# EAGLE board 24S IR PCB v12 (EAGLE 9.7.0)
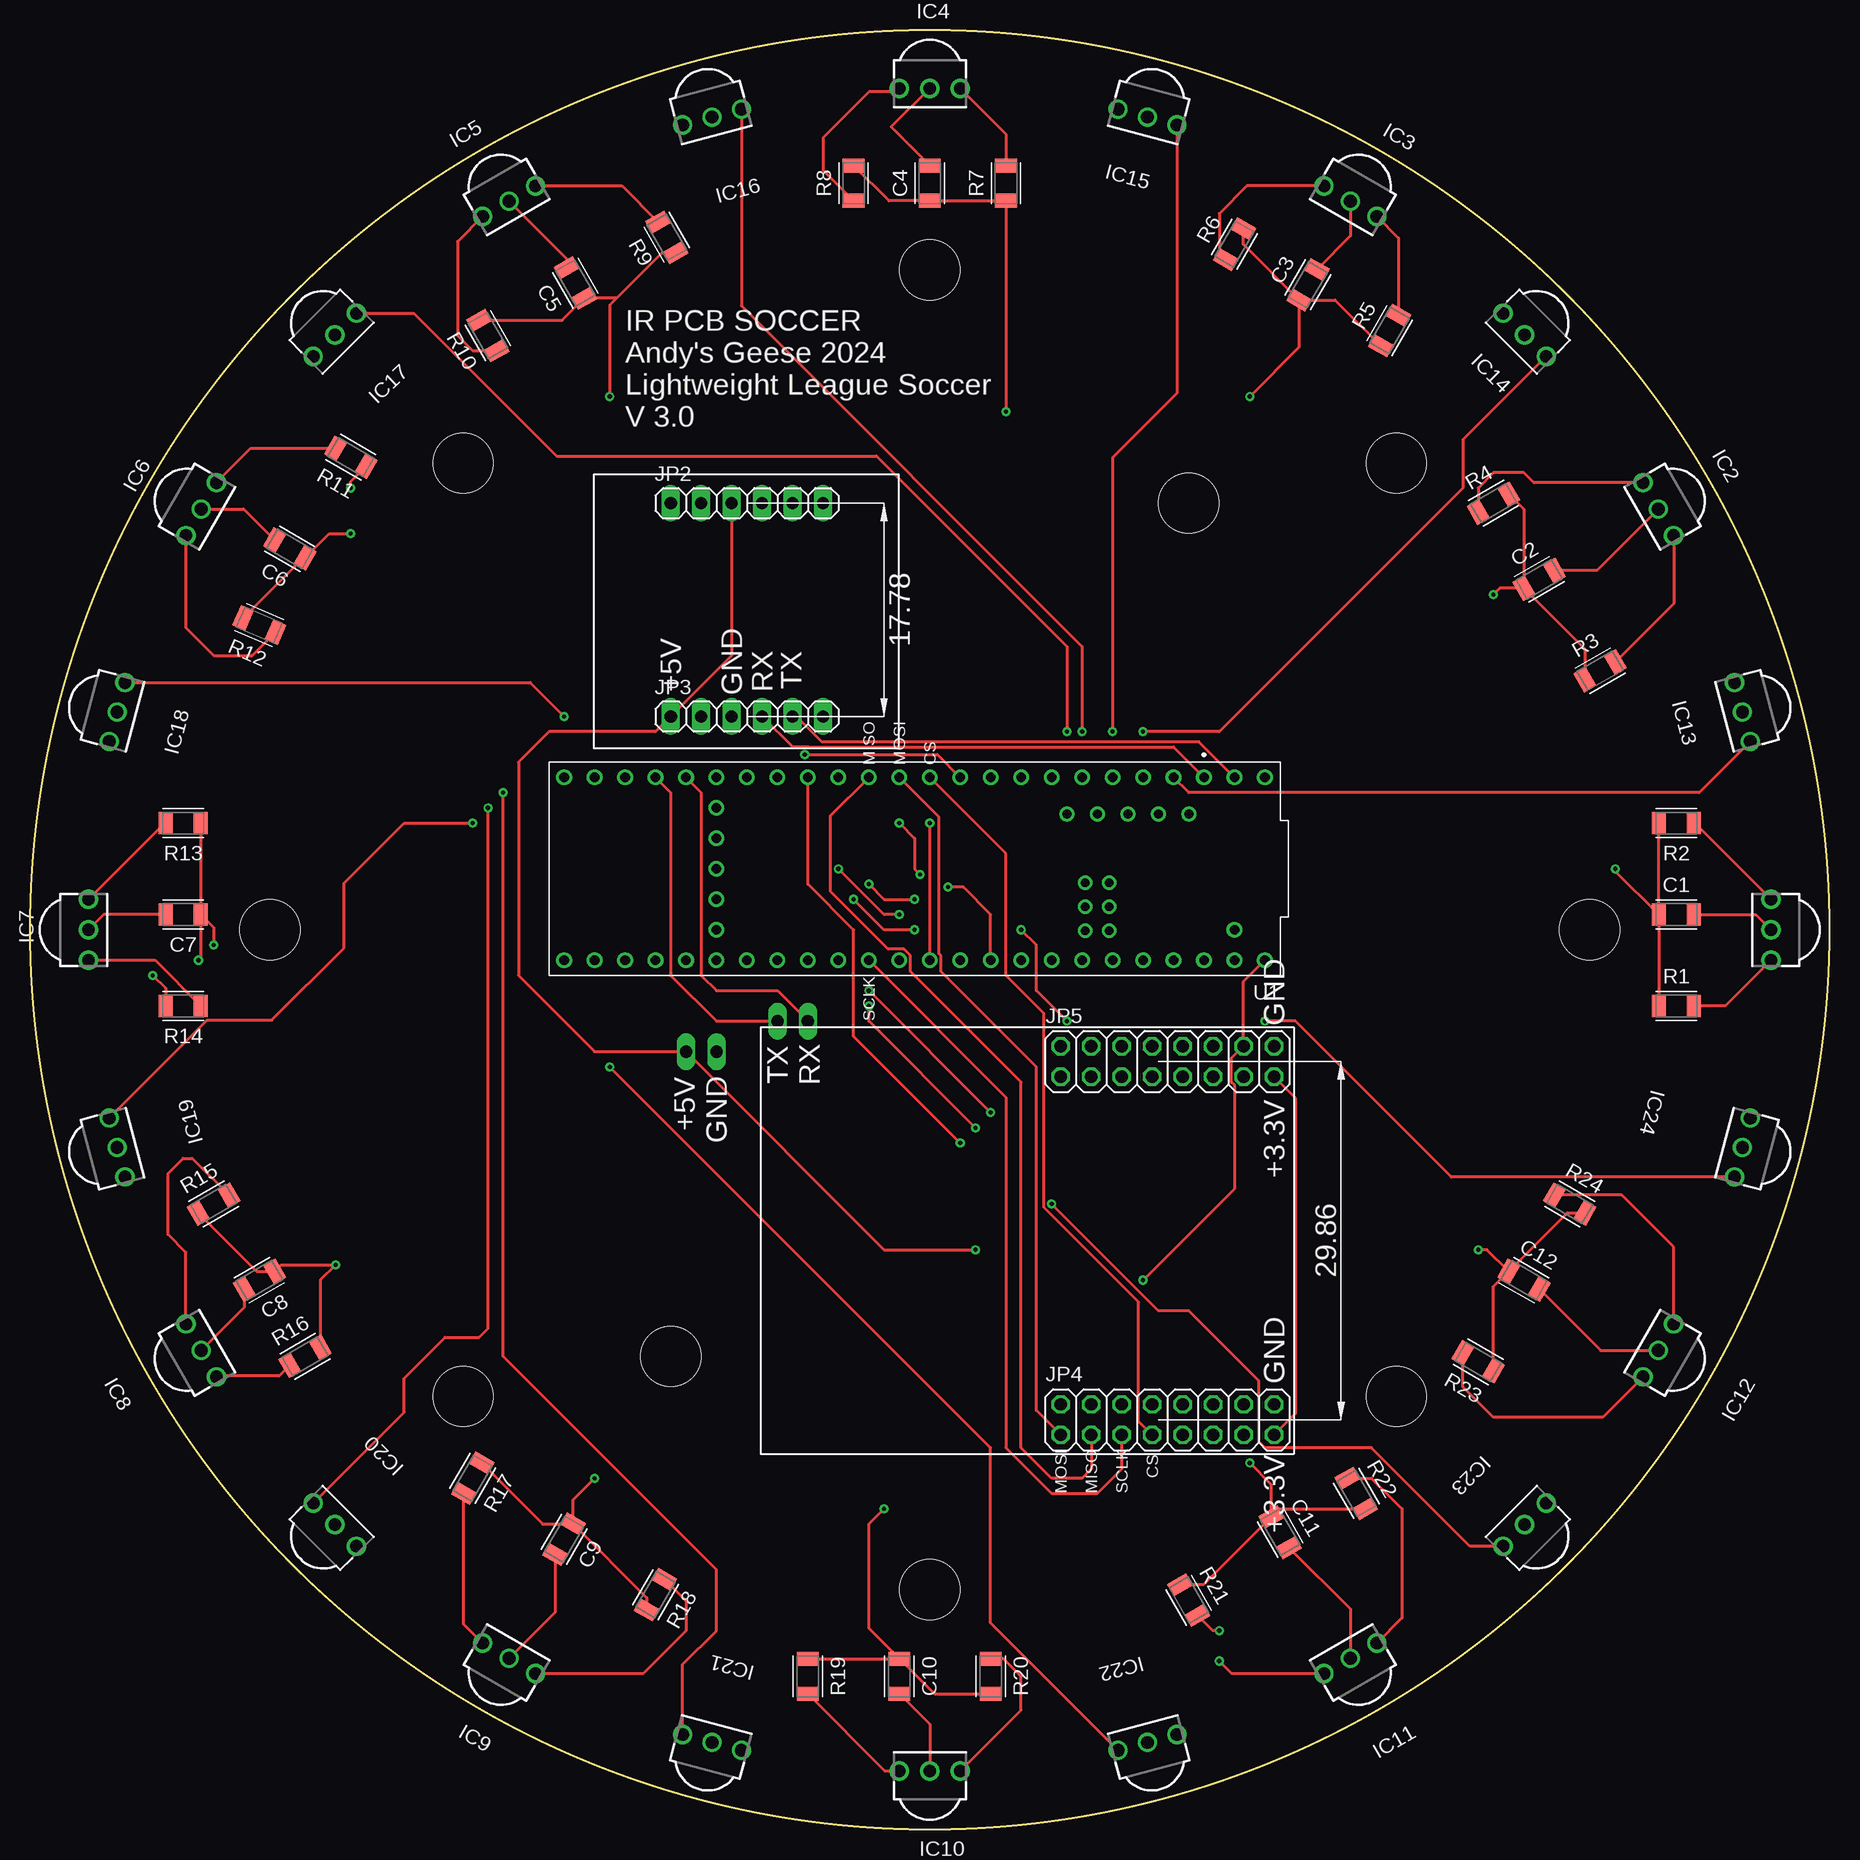
[diagram p0: board, top side]
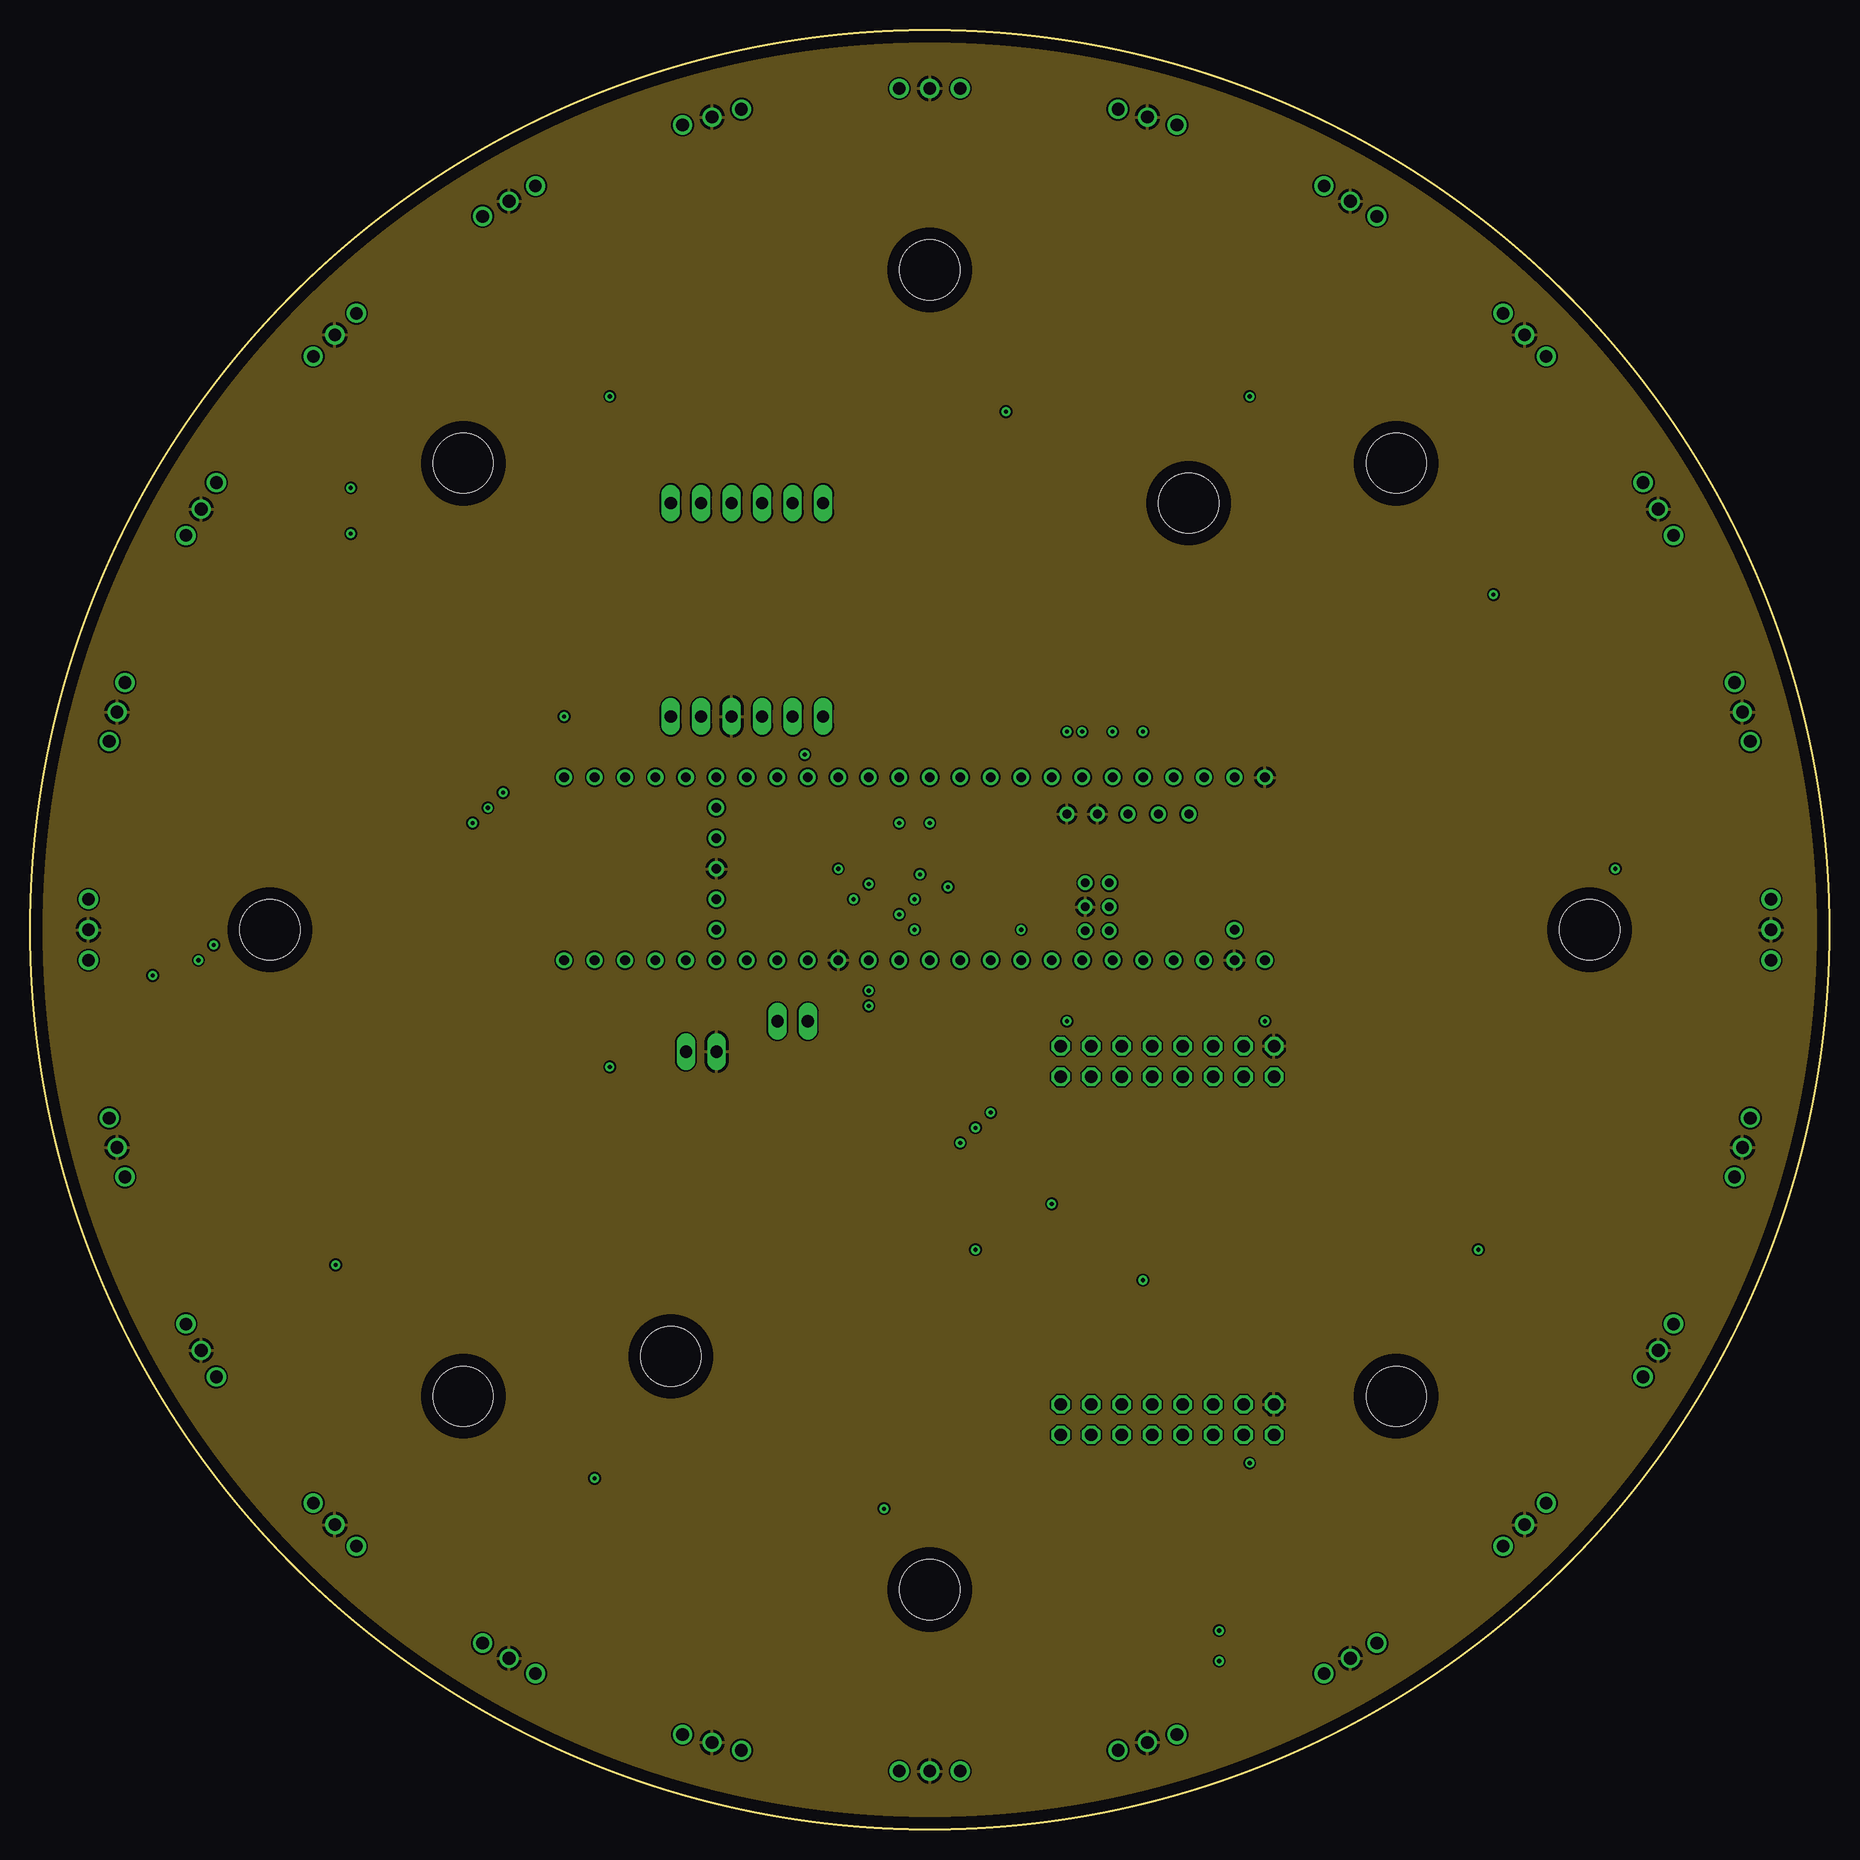
[diagram p1: board, inner layer Route2]
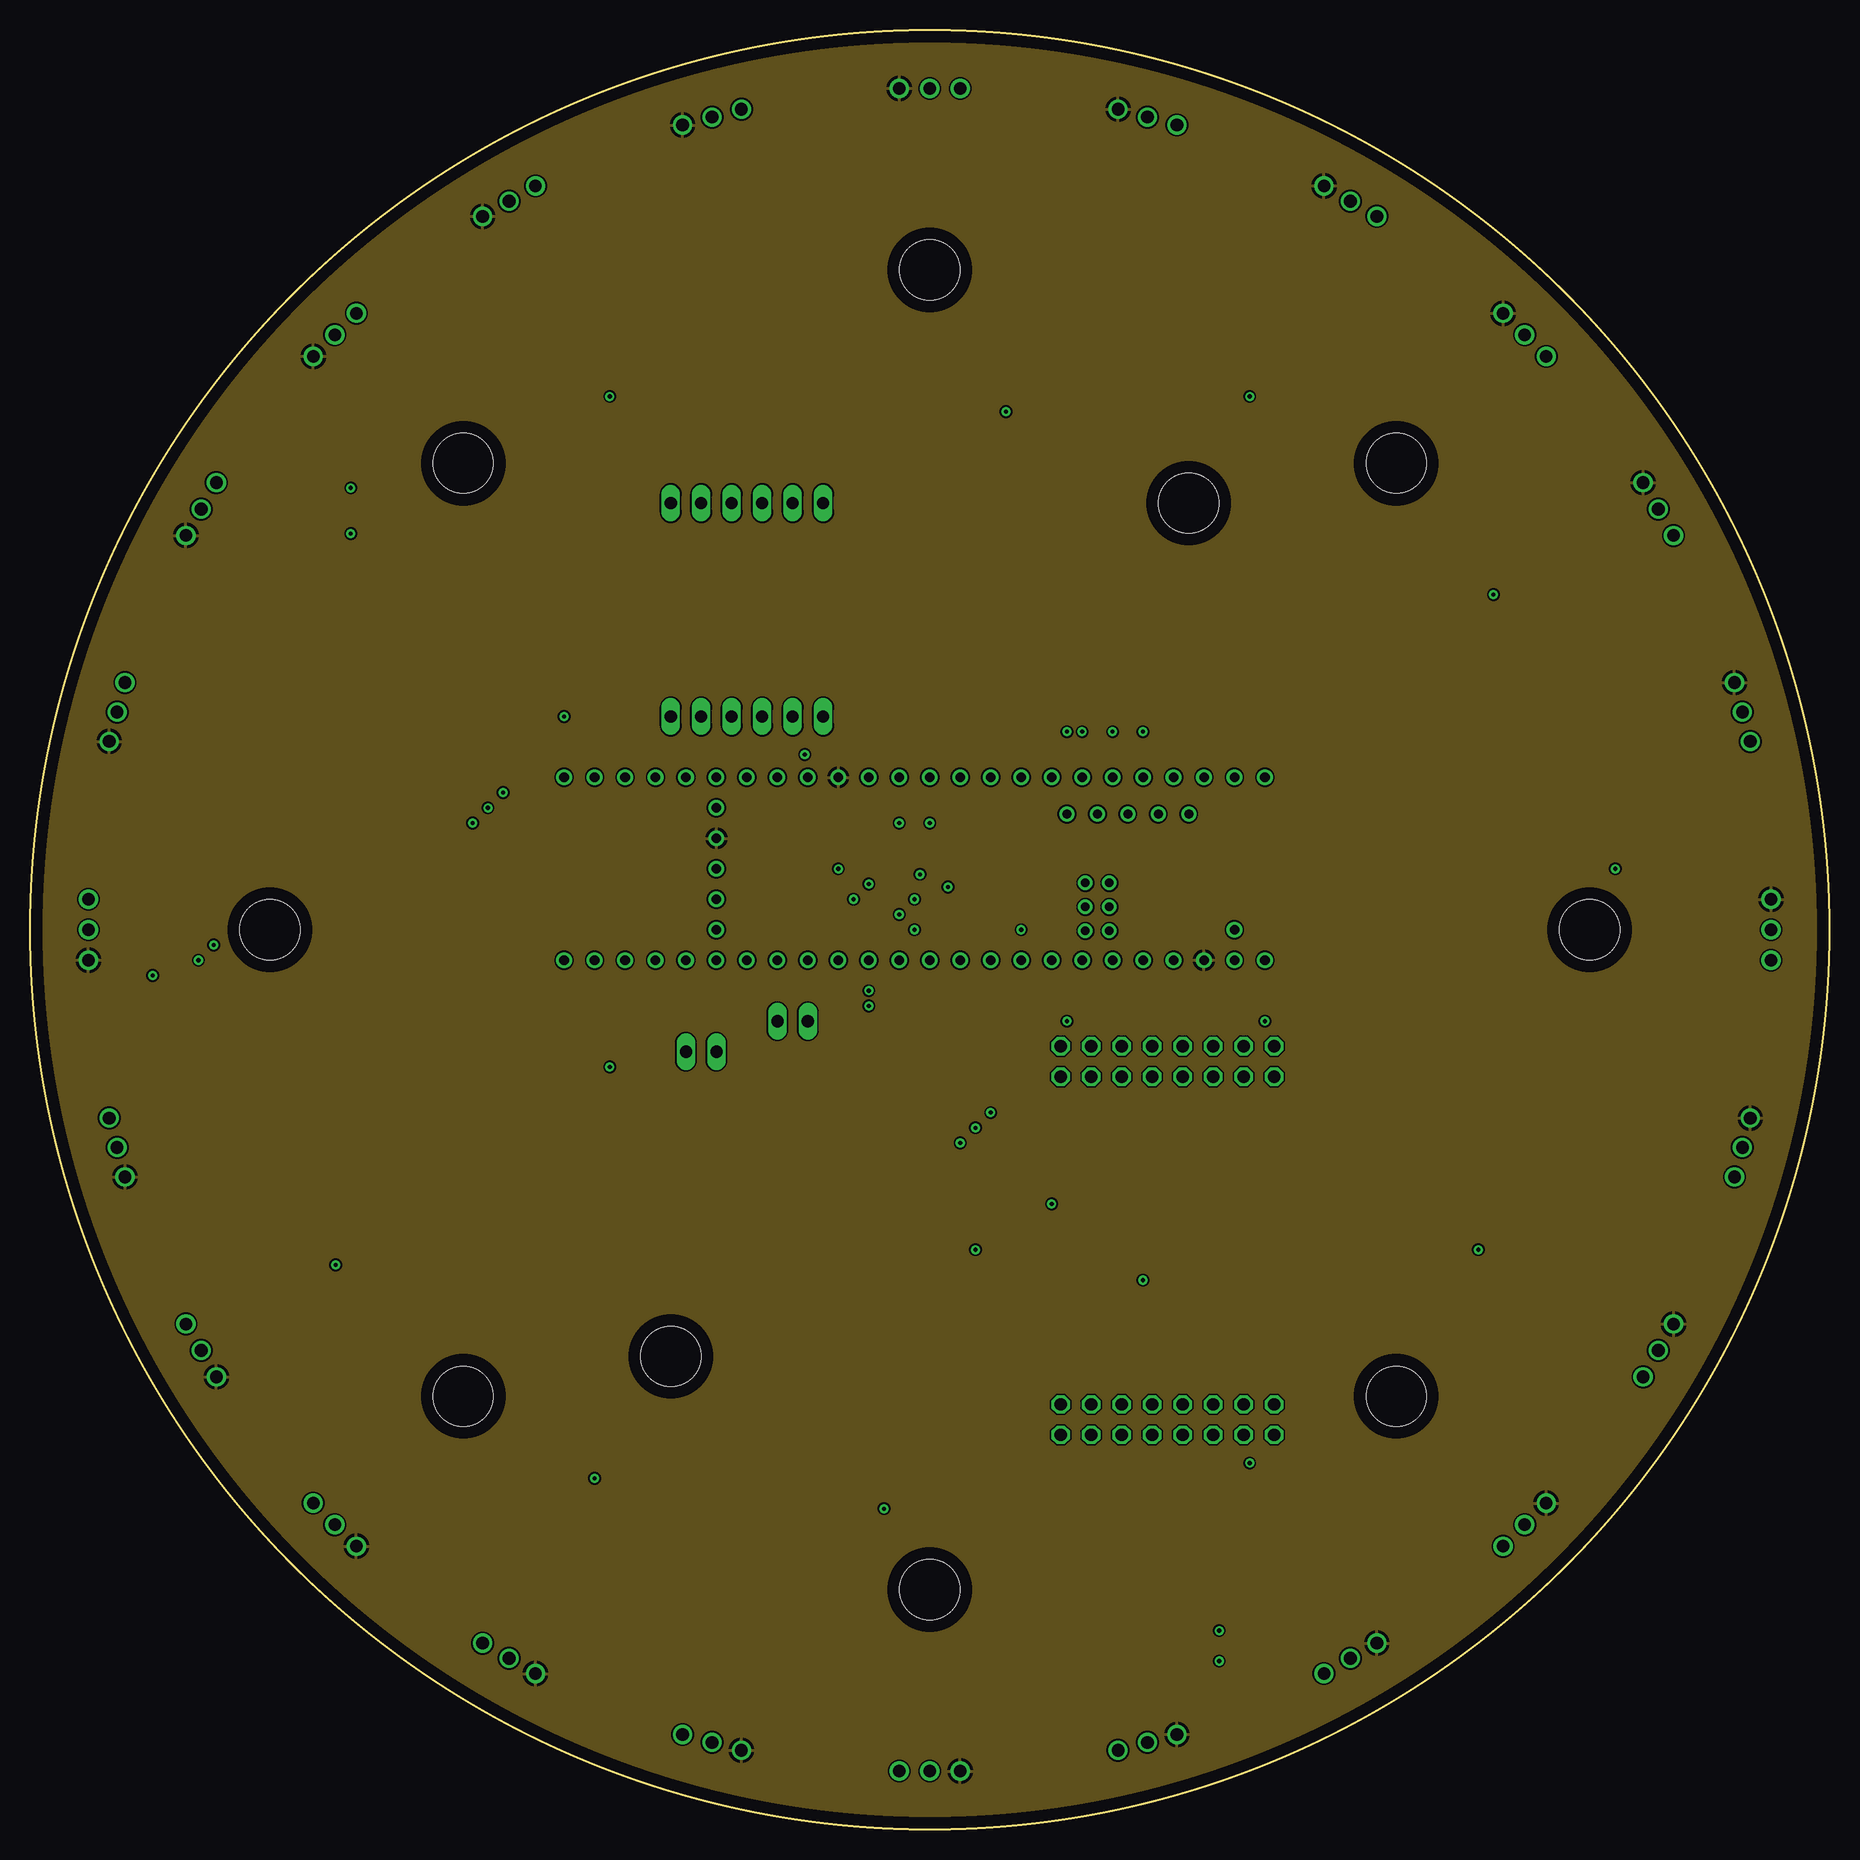
[diagram p2: board, inner layer Route15]
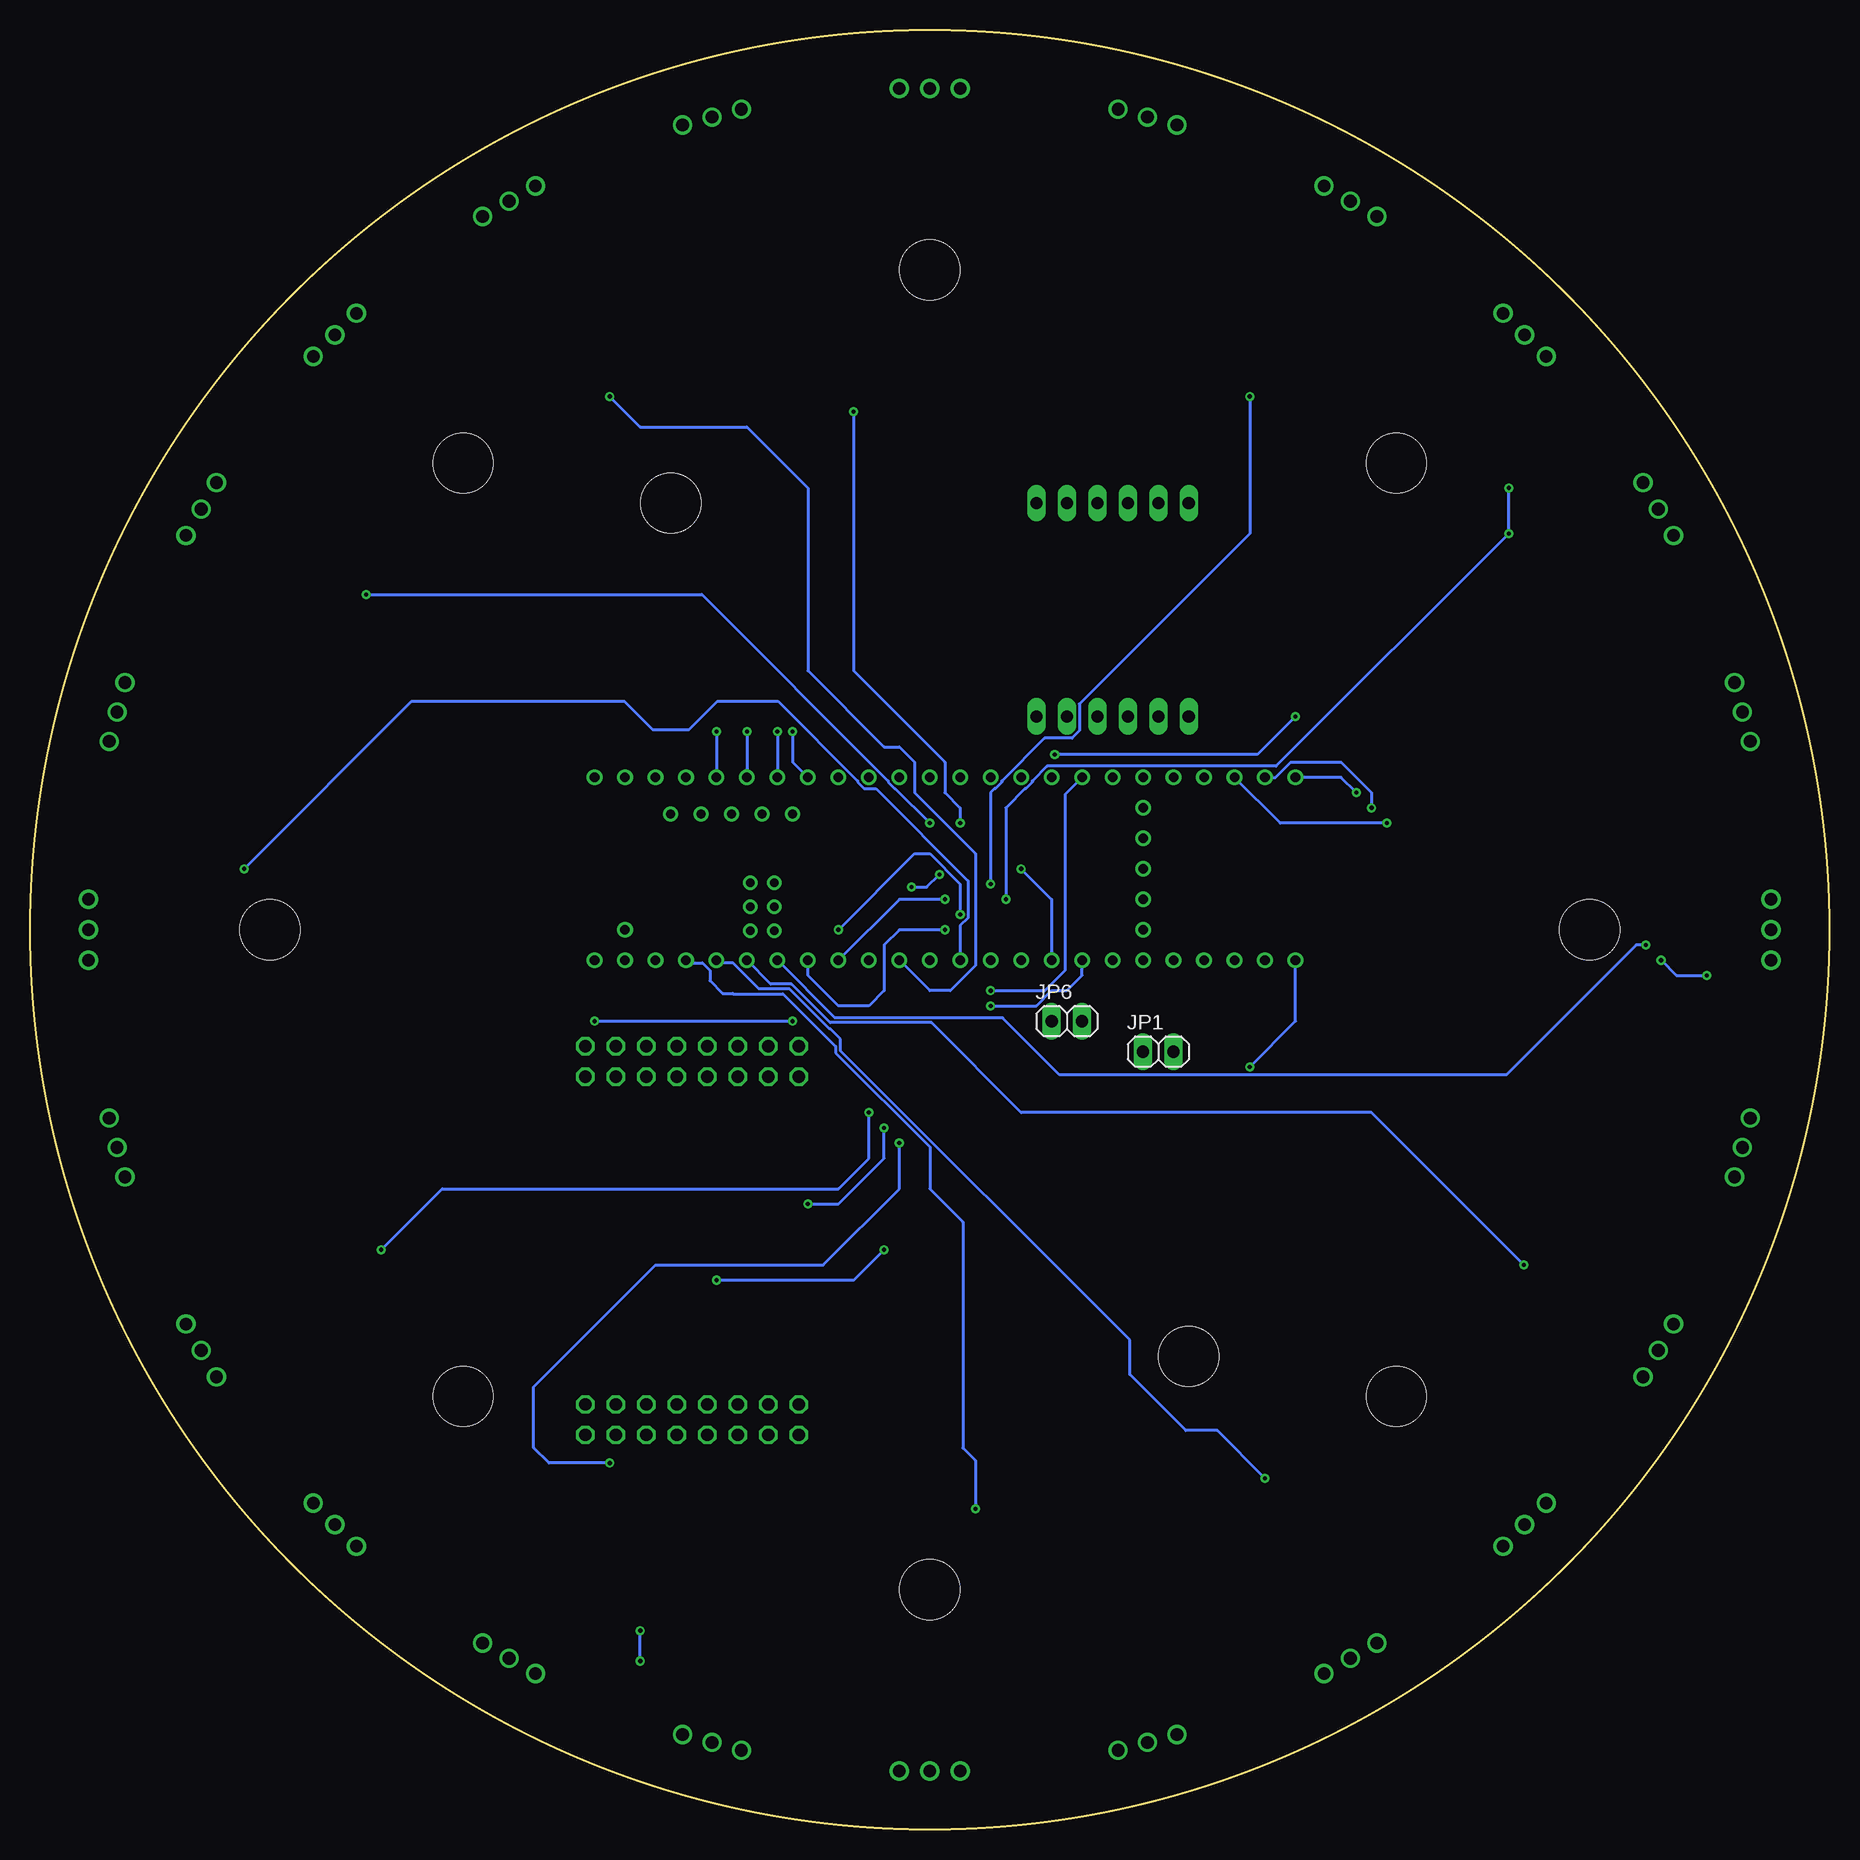
[diagram p3: board, bottom side, seen from below]

Size 150 x 150 mm. Coordinates in mm from the lower left corner, seen from the top.
Outline: circle at 75,75 radius 75
Copper layers (1+2*15+16): Top 0.035mm / dielectric 1.5mm / Route2 0.035mm / dielectric 0.15mm / Route15 0.035mm / dielectric 0.2mm / Bottom 0.035mm
Design rules "default *": minimum track width 6mil, minimum drill 0.35mm, track to track 6mil, track to pad 6mil, pad to pad 6mil, via to via 6mil, smd to smd 6mil, copper to edge 40mil, drill to drill 6mil, minimum pad ring 10mil, minimum via ring 8mil, stop-mask expansion 4mil, vias tented up to drill 0mil, thermal gap 10mil
Holes 5 mm at 130,75 113.89,113.89 75,130 36.11,113.89 20,75 36.11,36.11 75,20 113.89,36.11 96.59,110.56 53.41,39.44

## Footprints (pad centres in the part's own frame; a part is rotated, then mirrored left to right if it is on the bottom)
CAPC3216X135 = smd 1.165 x 1.815: 1 -1.475,0; 2 1.475,0
TSSP4038 = drill 1.06 pad 1.6: 1 -2.54,-1.55; 2 0,-1.55; 3 2.54,-1.55
1X02 = drill 1.016 long: 1 -1.27,0; 2 1.27,0
1X06 = drill 1.016 long: 1 -6.35,0; 2 -3.81,0; 3 -1.27,0; 4 1.27,0; 5 3.81,0; 6 6.35,0
2X08 = drill 1.016 octagon: 1 -8.89,-1.27; 2 -8.89,1.27; 3 -6.35,-1.27; 4 -6.35,1.27; 5 -3.81,-1.27; 6 -3.81,1.27; 7 -1.27,-1.27; 8 -1.27,1.27; 9 1.27,-1.27; 10 1.27,1.27; 11 3.81,-1.27; 12 3.81,1.27; 13 6.35,-1.27; 14 6.35,1.27; 15 8.89,-1.27; 16 8.89,1.27
RESC3216X70 = smd 1.165 x 1.815: 1 -1.475,0; 2 1.475,0
MODULE_DEV-16771 = drill 0.8: 0 -26.67,-7.62; 1 -24.13,-7.62; 2 -21.59,-7.62; 3 -19.05,-7.62; 3.3V_1 6.35,-7.62; 3.3V_2 -24.13,7.62; 3.3V_3 16.51,-2.54; 4 -16.51,-7.62; 5 -13.97,-7.62; 6 -11.43,-7.62; 7 -8.89,-7.62; 8 -6.35,-7.62; 9 -3.81,-7.62; 10 -1.27,-7.62; 11 1.27,-7.62; 12 3.81,-7.62; 13 3.81,7.62; 14 1.27,7.62; 15 -1.27,7.62; 16 -3.81,7.62; 17 -6.35,7.62; 18 -8.89,7.62; 19 -11.43,7.62; 20 -13.97,7.62; 21 -16.51,7.62; 22 -19.05,7.62; 23 -21.59,7.62; 24 8.89,-7.62; 25 11.43,-7.62; 26 13.97,-7.62; 27 16.51,-7.62; 28 19.05,-7.62; 29 21.59,-7.62; 30 24.13,-7.62; 31 26.67,-7.62; 32 29.21,-7.62; 33 29.21,7.62; 34 26.67,7.62; 35 24.13,7.62; 36 21.59,7.62; 37 19.05,7.62; 38 16.51,7.62; 39 13.97,7.62; 40 11.43,7.62; 41 8.89,7.62; GND1 -29.21,-7.62; GND2 6.35,7.62; GND3 -26.67,7.62; GND4 16.51,0; ON/OFF 16.51,5.08; PROGRAM 16.51,2.54; VBAT 16.51,-5.08; VIN -29.21,7.62; VUSB -26.67,5.08 | drill 0.75: 5V -22.86,-4.57; D+ -17.78,-4.57; D- -20.32,-4.57; USB_GND1 -15.24,-4.57; USB_GND2 -12.7,-4.57 | drill 0.7: GND5 -14.24,3.17; LED -16.24,3.17; R+ -16.24,5.17; R- -14.24,5.17; T+ -14.24,1.17; T- -16.24,1.17

## Placement (x,y rotation side)
C1  4.7uF  [CAPC3216X135]  137.23,76.27 0 top
C2  4.7uF  [CAPC3216X135]  125.8,104.21 30 top
C3  4.7uF  [CAPC3216X135]  106.53,128.76 60 top
C4  4.7uF  [CAPC3216X135]  75,137.23 90 top
C5  4.7uF  [CAPC3216X135]  45.46,128.91 120 top
C6  4.7uF  [CAPC3216X135]  21.66,106.75 150 top
C7  4.7uF  [CAPC3216X135]  12.77,76.27 180 top
C8  4.7uF  [CAPC3216X135]  19.12,45.79 210 top
C9  4.7uF  [CAPC3216X135]  44.52,24.2 240 top
C10  4.7uF  [CAPC3216X135]  72.46,12.77 270 top
C11  4.7uF  [CAPC3216X135]  104.21,24.77 300 top
C12  4.7uF  [CAPC3216X135]  124.53,45.79 330 top
IC1  TSSP4038  [TSSP4038]  143.58,75 90 top
IC2  TSSP4038  [TSSP4038]  134.39,109.29 120 top
IC3  TSSP4038  [TSSP4038]  109.29,134.39 150 top
IC4  TSSP4038  [TSSP4038]  75,143.58 180 top
IC5  TSSP4038  [TSSP4038]  40.71,134.39 210 top
IC6  TSSP4038  [TSSP4038]  15.61,109.29 240 top
IC7  TSSP4038  [TSSP4038]  6.42,75 270 top
IC8  TSSP4038  [TSSP4038]  15.61,40.71 300 top
IC9  TSSP4038  [TSSP4038]  40.71,15.61 330 top
IC10  TSSP4038  [TSSP4038]  75,6.42 0 top
IC11  TSSP4038  [TSSP4038]  109.29,15.61 30 top
IC12  TSSP4038  [TSSP4038]  134.39,40.71 60 top
IC13  TSSP4038  [TSSP4038]  141.24,92.75 105 top
IC14  TSSP4038  [TSSP4038]  123.49,123.49 135 top
IC15  TSSP4038  [TSSP4038]  92.75,141.24 165 top
IC16  TSSP4038  [TSSP4038]  57.25,141.24 195 top
IC17  TSSP4038  [TSSP4038]  26.51,123.49 225 top
IC18  TSSP4038  [TSSP4038]  8.76,92.75 255 top
IC19  TSSP4038  [TSSP4038]  8.76,57.25 285 top
IC20  TSSP4038  [TSSP4038]  26.51,26.51 315 top
IC21  TSSP4038  [TSSP4038]  57.25,8.76 345 top
IC22  TSSP4038  [TSSP4038]  92.75,8.76 15 top
IC23  TSSP4038  [TSSP4038]  123.49,26.51 45 top
IC24  TSSP4038  [TSSP4038]  141.24,57.25 75 top
JP1  PINHD-1X2  [1X02]  55.95,64.84 0 bottom
JP2  PINHD-1X6  [1X06]  59.76,110.56 0 top
JP3  PINHD-1X6  [1X06]  59.76,92.78 0 top
JP4  PINHD-2X8  [2X08]  94.81,34.16 0 top
JP5  PINHD-2X8  [2X08]  94.81,64.02 0 top
JP6  PINHD-1X2  [1X02]  63.57,67.38 0 bottom
R1  220  [RESC3216X70]  137.23,68.65 0 top
R2  10k  [RESC3216X70]  137.23,83.89 180 top
R3  220  [RESC3216X70]  130.88,96.59 30 top
R4  10k  [RESC3216X70]  121.99,110.56 30 top
R5  220  [RESC3216X70]  113.33,124.95 60 top
R6  10k  [RESC3216X70]  100.4,132.15 60 top
R7  220  [RESC3216X70]  81.35,137.23 90 top
R8  10k  [RESC3216X70]  68.65,137.23 90 top
R9  220  [RESC3216X70]  53.08,132.72 120 top
R10  10k  [RESC3216X70]  38.17,124.53 120 top
R11  220  [RESC3216X70]  26.74,114.39 150 top
R12  10k  [RESC3216X70]  19.12,100.4 156.6 top
R13  220  [RESC3216X70]  12.77,83.89 180 top
R14  10k  [RESC3216X70]  12.77,68.65 180 top
R15  220  [RESC3216X70]  15.31,52.14 30 top
R16  10k  [RESC3216X70]  22.93,39.44 30 top
R17  220  [RESC3216X70]  36.9,29.28 240 top
R18  10k  [RESC3216X70]  52.14,19.58 240 top
R19  220  [RESC3216X70]  64.84,12.77 270 top
R20  10k  [RESC3216X70]  80.08,12.77 270 top
R21  220  [RESC3216X70]  96.59,19.12 300 top
R22  10k  [RESC3216X70]  110.56,28.01 300 top
R23  220  [RESC3216X70]  120.72,38.98 150 top
R24  10k  [RESC3216X70]  128.34,52.14 330 top
U1  DEV-16771  [MODULE_DEV-16771]  73.73,80.08 180 top

## Library data of the parts
C1-C12 = Tutorial - Fusion 360; CATEGORY: Capacitor
IC1-IC24 = TSSP4038; DESCRIPTION: IR Receiver Module 38KHz 25m EMI 3-Pin Vishay TSSP4038, 38kHz IR Receiver, 950nm +/-45 , 25m Range, 2.5V - 5V, Through Hole, 6 x 3.9 x 6.95mm; HEIGHT: mm; MANUFACTURER_NAME: Vishay; MANUFACTURER_PART_NUMBER: TSSP4038; MOUSER_PART_NUMBER: 782-TSSP4038; MOUSER_PRICE-STOCK: https://www.mouser.co.uk/ProductDetail/Vishay-Semiconductors/TSSP4038?qs=lgjwDzixuo3Ja5hn%252BEmOdw%3D%3D
JP1 JP6 = Connector; CATEGORY: Headers; DESCRIPTION: Header, Straight, 2 Position; MANUFACTURER: Generic; MPN: Generic; OPERATING_TEMPERATURE: Generic; PART_STATUS: Active; PITCH: 0.100" (2.54mm); ROHS_COMPLIANCE: Generic; SERIES: Generic; SUB-CATEGORY: Headers, Male Pins; TYPE: Board to Board or Cable, Unshrouded, Through Hole, Straight
JP2 JP3 = Connector; CATEGORY: Headers; DESCRIPTION: Header, Straight, 6 Position; MANUFACTURER: Generic; MPN: Generic; OPERATING_TEMPERATURE: Generic; PART_STATUS: Active; PITCH: 0.100" (2.54mm); ROHS_COMPLIANCE: Generic; SERIES: Generic; SUB-CATEGORY: Headers, Male Pins; TYPE: Board to Board or Cable, Unshrouded, Through Hole, Straight
JP4 JP5 = Connector; CATEGORY: Headers; DESCRIPTION: Header, Straight, 2x8 Position; MANUFACTURER: Generic; MPN: Generic; OPERATING_TEMPERATURE: Generic; PART_STATUS: Active; PITCH: 0.100" (2.54mm); ROHS_COMPLIANCE: Generic; SERIES: Generic; SUB-CATEGORY: Headers, Male Pins; TYPE: Board to Board or Cable, Unshrouded, Through Hole, Straight
R1-R24 = Resistor; CATEGORY: Resistor; SUB-CATEGORY: Fixed
U1 = DEV-16771; AVAILABILITY: In Stock; CHECK_PRICES: https://www.snapeda.com/parts/DEV-16771/SparkFun+Electronics/view-part/?ref=eda; DESCRIPTION: RT1062 Teensy 4.1 series ARM® Cortex®-M7 MPU Embedded Evaluation Board; MF: SparkFun Electronics; MP: DEV-16771; PACKAGE: None; PRICE: None; PURCHASE-URL: https://www.snapeda.com/api/url_track_click_mouser/?unipart_id=4833875&manufacturer=SparkFun Electronics&part_name=DEV-16771&search_term=None; SNAPEDA_LINK: https://www.snapeda.com/parts/DEV-16771/SparkFun+Electronics/view-part/?ref=snap

## Nets
3.3VRAIL: JP4.15 JP5.15
3V3: IC1.3 IC2.3 IC3.3 IC4.3 IC5.3 IC6.3 IC7.3 IC8.3 IC9.3 IC10.3 IC11.3 IC12.3 IC13.3 IC14.3 IC15.3 IC16.3 IC17.3 IC18.3 IC19.3 IC20.3 IC21.3 IC22.3 IC23.3 IC24.3 R2.1 R4.1 R6.1 R8.1 R10.1 R12.1 R14.1 R16.1 R18.1 R20.1 R22.1 R24.1 U1.3.3V_1 U1.3.3V_2 U1.3.3V_3
5V: U1.5V
+5V: JP1.2 JP2.3 JP3.1 JP5.14 U1.VIN
CS: JP2.6
GND: C1.2 C2.2 C3.2 C4.2 C5.2 C6.2 C7.2 C8.2 C9.2 C10.2 C11.2 C12.2 IC1.2 IC2.2 IC3.2 IC4.2 IC5.2 IC6.2 IC7.2 IC8.2 IC9.2 IC10.2 IC11.2 IC12.2 IC13.2 IC14.2 IC15.2 IC16.2 IC17.2 IC18.2 IC19.2 IC20.2 IC21.2 IC22.2 IC23.2 IC24.2 JP1.1 JP3.3 JP4.16 JP5.16 U1.GND1 U1.GND2 U1.GND3 U1.GND4 U1.GND5 U1.USB_GND1 U1.USB_GND2
MOSI: JP2.5
N$1: IC12.1 R23.2
N$2: IC1.1 R1.2
N$3: IC2.1 R3.2
N$5: IC3.1 R5.2
N$7: IC4.1 R7.2
N$9: IC5.1 R9.2
N$11: IC6.1 R11.2
N$13: IC7.1 R13.2
N$15: IC8.1 R15.2
N$17: IC9.1 R17.2
N$19: IC10.1 R19.2
N$21: IC11.1 R21.2
P0: JP4.1 U1.11
P0_BNO: JP2.2
P1: JP4.3 U1.12
P2: JP4.5 U1.13
P3: JP4.7 U1.10
P4: JP4.9
P5: JP4.11
RX: JP6.1 U1.28
SCL: JP3.4 U1.1
SDA: JP3.5 U1.0
TSSP1: C1.1 R1.1 R2.2 U1.14
TSSP2: C2.1 R3.1 R4.2 U1.15
TSSP3: C3.1 R5.1 R6.2 U1.16
TSSP4: C4.1 R7.1 R8.2 U1.17
TSSP5: C5.1 R9.1 R10.2 U1.18
TSSP6: C6.1 R11.1 R12.2 U1.19
TSSP7: C7.1 R13.1 R14.2 U1.20
TSSP8: C8.1 R15.1 R16.2 U1.21
TSSP9: C9.1 R17.1 R18.2 U1.22
TSSP10: C10.1 R19.1 R20.2 U1.23
TSSP11: C11.1 R21.1 R22.2 U1.24
TSSP12: C12.1 R23.1 R24.2 U1.25
TSSP13: IC13.1 U1.2
TSSP14: IC14.1 U1.3
TSSP15: IC15.1 U1.4
TSSP16: IC16.1 U1.5
TSSP17: IC17.1 U1.6
TSSP18: IC18.1 U1.9
TSSP19: IC19.1 U1.30
TSSP20: IC20.1 U1.31
TSSP21: IC21.1 U1.32
TSSP22: IC22.1 U1.33
TSSP23: IC23.1 U1.40
TSSP24: IC24.1 U1.41
TX: JP6.2 U1.29

## Tracks (layer width: path | path; a pad name or v marks a point on that pad's centre or on a via)
3.3VRAIL
  Top 0.254: JP5.15 105.48,60.98 105.48,34.67 JP4.15
3V3
  Top 0.254: R2.1 138.6,83.99 138.68,83.99 IC1.3 | IC2.3 125.37,112.27 124.53,113.1 121.99,113.1 120.71,111.82 R4.1 | IC3.3 101.44,137 99.13,134.69 99.13,131.41 R6.1 | IC4.3 72.18,144.85 69.92,144.85 66.11,141.04 66.11,138.3 R8.1 | IC5.3 35.63,132.36 35.63,124.53 36.91,123.25 R10.1 | IC12.3 137,48.56 132.68,52.88 R24.1 | R18.1 54.68,19.05 54.68,16.58 51.1,13 IC9.3 | IC7.3 10.44,72.46 R14.1 | IC6.3 13,100.17 15.31,97.86 18.52,97.86 R12.1 | IC10.3 82.62,9.95 82.62,12.77 81.14,14.24 R20.1 | R16.1 20.76,37.8 15.6,37.8 IC8.3 | R22.1 111.82,29.29 114.37,26.74 114.37,17.64 IC11.3
  pour Route15: -22.71,33.12 21.69,-11.28 55.97,-11.28 55.99,-11.3 57.25,-12.55 180.38,-12.55 186.68,-6.25 186.68,61 185.43,62.26 185.41,62.28 185.41,146.09 175.3,156.2 -22.71,156.2
+5V  (via drill 0.35)
  Top 0.254: JP2.3 58.49,97.86 JP3.1 52.14,91.51 43.25,91.51 40.71,88.97 40.71,71.19 47.06,64.84 JP1.2 71.19,48.33 v78.81,48.33 | v92.78,45.79 100.4,53.41 100.4,62.04 100.12,62.32 100.12,64.25 JP5.14 101.16,70.68 U1.VIN
  Bottom 0.254: v78.81,48.33 81.35,45.79 v92.78,45.79
GND
  Top 0.254: C7.2 6.14,76.27 IC7.2 | IC6.2 17.8,110.06 C6.2 | C4.2 71.79,141.92 IC4.2 | IC5.2 44.72,130.95 C5.2 | C9.2 43.78,18.11 IC9.2 | C8.2 17.84,43.51 IC8.2 | C10.2 75,8.75 IC10.2 | C11.2 110.06,18.38 IC11.2 | C12.2 130.93,39.94 IC12.2 | C1.2 143.86,76.27 IC1.2 | IC2.2 130.62,104.95 C2.2 | IC3.2 110.06,132.84 C3.2
  pour Route2: 172.76,-29.06 196.81,-5.01 195.59,-3.78 195.57,-3.76 195.57,146.09 180.38,161.28 -30.33,161.28 -30.33,29.31 28.04,-29.06
N$1
  Top 0.254: IC12.1 131.09,34.36 121.99,34.36 119.44,36.91 R23.2
N$2
  Top 0.254: IC1.1 141.32,68.65 R1.2
N$3
  Top 0.254: IC2.1 137,102.17 R3.2
N$5
  Top 0.254: IC3.1 114.07,132.66 R5.2
N$7
  Top 0.254: IC4.1 81.35,141.32 R7.2
N$9
  Top 0.254: IC5.1 49.34,137 R9.2
N$11
  Top 0.254: IC6.1 18.4,115.13 R11.2
N$13
  Top 0.254: IC7.1 11.22,83.89 R13.2
N$15
  Top 0.254: IC8.1 13,48.1 11.5,49.6 11.5,54.68 12.77,55.95 13.52,55.95 R15.2
N$17
  Top 0.254: IC9.1 36.16,17.11 R17.2
N$19
  Top 0.254: IC10.1 71.27,4.87 R19.2
N$21  (via drill 0.35)
  Top 0.254: IC11.1 100.17,13 v99.13,14.04 | v99.13,16.58 98.59,16.58 R21.2
  Bottom 0.254: v99.13,14.04 v99.13,16.58
P0
  Top 0.254: JP4.1 83.89,34.93 83.89,63.57 75.93,71.53 75.93,72.85 75.76,73.02 75.76,84.4 U1.11
P1
  Top 0.254: JP4.3 88.46,30.04 87.7,29.28 85.16,29.28 82.62,31.82 82.62,62.3 73.39,71.53 73.39,72.85 72.85,73.39 71.53,73.39 66.72,78.2 66.72,84.5 U1.12
P2
  Top 0.254: U1.13 81.35,61.03 81.35,31.82 85.16,28.01 88.97,28.01 91,30.04 JP4.5
P3
  Top 0.254: JP4.7 92.4,34.04 92.4,43.97 84.5,51.87 84.5,68.04 81.35,71.19 81.35,81.35 U1.10
RX
  Top 0.254: U1.28 55.95,86.43 55.95,71.19 57.22,69.92 62.3,69.92 JP6.1
SCL
  Top 0.254: U1.1 95.32,90.24 64.88,90.24 64.86,90.26 63.55,90.26 JP3.4
SDA
  Top 0.254: JP3.5 63.88,92.78 66.01,90.65 97.45,90.65 U1.0
TSSP1  (via drill 0.35)
  Top 0.254: C1.1 R1.1 | C1.1 R2.2 | C1.1 132.15,79.88 v132.15,80.08
  Bottom 0.254: v132.15,80.08 118.18,94.05 100.47,94.05 98.1,91.68 95.08,91.68 92.71,94.05 87.65,94.05 81.01,87.41 81.01,87.31 80.47,86.77 79.49,86.77 71.8,79.08 71.8,76 72.46,75.34 U1.14
TSSP2  (via drill 0.35)
  Top 0.254: R4.2 124.52,110.04 C2.1 | C2.1 129.6,98.39 R3.1 | C2.1 122.52,103.47 v121.99,102.94 | U1.15 v75,83.89
  Bottom 0.254: v121.99,102.94 94,102.94 78.47,87.41 78.47,87.31 77.93,86.77 77.88,86.77 v75,83.89
TSSP3  (via drill 0.35)
  Top 0.254: C3.1 101.14,132.13 R6.2 | C3.1 108.78,127.48 R5.1 | C3.1 105.79,123.57 v101.67,119.45
  Bottom 0.254: v101.67,119.45 99.13,116.91 90.24,116.91 85.16,111.83 85.16,96.59 78.81,90.24 77.54,90.24 76.27,88.97 76.27,86.43 71.19,81.35 71.19,72 73.27,69.92 75,69.92 U1.16
TSSP4  (via drill 0.35)
  Top 0.254: R8.2 71.6,135.75 C4.1 R7.1 v81.35,118.18 | v72.46,83.89 73.73,82.62 73.73,80.08 v74.19,79.61 | v76.52,78.56 77.79,78.56 80.08,76.27 U1.17
  Bottom 0.254: v81.35,118.18 81.35,96.59 73.73,88.97 73.73,86.43 72.46,85.16 v72.46,83.89 | v76.52,78.56 75.25,78.56 v74.19,79.61
TSSP5  (via drill 0.35)
  Top 0.254: R10.2 44.37,125.81 C5.1 48.89,127.63 | R9.1 52.7,131.44 48.89,127.63 | v48.33,119.45 48.33,127.07 48.89,127.63 | v69.92,78.81 71.19,77.54 v73.73,77.54
  Bottom 0.254: v48.33,119.45 48.33,108.02 62.53,93.82 62.53,91.59 63.14,90.98 65.42,90.98 68.99,87.41 68.99,87.31 69.53,86.77 69.58,86.77 69.92,86.43 v69.92,78.81 | v73.73,77.54 77.54,77.54 U1.18
TSSP6  (via drill 0.35)
  Top 0.254: R12.2 22.79,106.01 C6.1 24.95,108.02 v26.74,108.02 | v26.74,111.83 26.74,112.37 R11.1 | v68.65,77.54 71.19,75 v73.73,75
  Bottom 0.254: v26.74,111.83 v26.74,108.02 46.13,88.63 65.23,88.63 66.45,87.41 66.45,87.31 66.99,86.77 67.04,86.77 68.65,85.16 v68.65,77.54 | v73.73,75 77.54,75 78.81,73.73 78.81,69.92 80.08,68.65 82.62,68.65 85.16,71.19 U1.19
TSSP7  (via drill 0.35)
  Top 0.254: C7.1 14.24,72.67 v14.04,72.46 | v10.23,71.19 11.3,70.12 R14.2 | R13.1 C7.1 | C7.1 15.31,75.2 v15.31,73.73
  Bottom 0.254: v14.04,72.46 12.77,71.19 v10.23,71.19 | v15.31,73.73 16.12,73.73 26.94,62.91 64.18,62.91 68.93,67.66 82.9,67.66 U1.20
TSSP8  (via drill 0.35)
  Top 0.254: R15.1 18.91,46.53 C8.1 20.93,47.06 v25.47,47.06 24.21,45.8 R16.2
  Bottom 0.254: v25.47,47.06 38.17,59.76 67.38,59.76 74.87,67.25 83.31,67.25 86.53,70.48 88.26,70.48 U1.21
TSSP9  (via drill 0.35)
  Top 0.254: R17.1 42.72,25.48 C9.1 | C9.1 51.4,19.33 R18.2 | C9.1 45.26,27.48 v47.06,29.28
  Bottom 0.254: v47.06,29.28 51.04,33.26 53.65,33.26 58.32,37.93 58.32,40.79 82.44,64.91 82.44,65.89 83.29,66.74 83.37,66.74 86.7,70.07 89.24,70.07 91.4,72.23 92.55,72.23 U1.22
TSSP10  (via drill 0.35)
  Top 0.254: C10.1 75.41,11.3 R20.2 | R19.1 C10.1 | C10.1 69.92,16.78 69.92,25.47 v71.19,26.74
  Bottom 0.254: v71.19,26.74 71.19,30.75 72.23,31.8 72.23,50.64 75,53.41 75,56.9 82.85,64.75 82.85,65.27 87.24,69.67 91.38,69.67 91.4,69.69 92.26,69.69 93.33,70.76 93.33,71.62 93.94,72.23 95.09,72.23 U1.23
TSSP11  (via drill 0.35)
  Top 0.254: R22.2 104.16,26.73 C11.1 | C11.1 97.82,20.4 R21.1 | C11.1 103.47,28.75 v101.67,30.55 | v77.54,57.22 68.65,66.11 68.65,75 64.84,78.81 U1.24
  Bottom 0.254: v101.67,30.55 106.75,30.55 108.02,31.82 108.02,36.9 97.86,47.06 83.89,47.06 77.54,53.41 v77.54,57.22
TSSP12  (via drill 0.35)
  Top 0.254: R23.1 122,45.27 C12.1 | C12.1 128.13,51.4 R24.2 | C12.1 121.45,48.33 v120.72,48.33 | v69.92,69.92 v80.08,59.76
  Bottom 0.254: v120.72,48.33 115.64,53.41 82.62,53.41 80.08,55.95 v80.08,59.76 | U1.25 63.7,86.3 63.7,71.64 65.41,69.92 v69.92,69.92
TSSP13
  Top 0.254: IC13.1 139.13,86.43 96.59,86.43 U1.2
TSSP14  (via drill 0.35)
  Top 0.254: IC14.1 119.45,115.86 119.45,111.83 99.13,91.51 v92.78,91.51
  Bottom 0.254: v92.78,91.51 U1.3
TSSP15  (via drill 0.35)
  Top 0.254: IC15.1 95.6,119.73 90.24,114.37 v90.24,91.51
  Bottom 0.254: v90.24,91.51 U1.4
TSSP16  (via drill 0.35)
  Top 0.254: IC16.1 59.3,127.02 87.7,98.62 v87.7,91.51
  Bottom 0.254: v87.7,91.51 U1.5
TSSP17  (via drill 0.35)
  Top 0.254: IC17.1 32,126.38 43.89,114.5 70.56,114.5 86.43,98.62 v86.43,91.51
  Bottom 0.254: v86.43,91.51 86.43,88.97 U1.6
TSSP18  (via drill 0.35)
  Top 0.254: IC18.1 41.7,95.6 v44.52,92.78 | v64.59,89.61 75.64,89.61 U1.9
  Bottom 0.254: v44.52,92.78 47.7,89.61 v64.59,89.61
TSSP19  (via drill 0.35)
  Top 0.254: v36.9,83.89 31.19,83.89 26.18,78.88 26.18,73.49 20.16,67.46 14.76,67.46 IC19.1
  Bottom 0.254: v36.9,83.89 45.79,83.89 U1.30
TSSP20  (via drill 0.35)
  Top 0.254: v38.17,85.16 38.17,41.76 37.43,41.02 34.6,41.02 31.2,37.62 31.2,34.79 IC20.1
  Bottom 0.254: v38.17,85.16 38.17,86.43 40.71,88.97 44.9,88.97 46.17,87.7 U1.31
TSSP21  (via drill 0.35)
  Top 0.254: IC21.1 54.4,13.76 57.22,16.58 57.22,21.66 39.44,39.44 v39.44,86.43
  Bottom 0.254: v39.44,86.43 40.71,87.7 U1.32
TSSP22  (via drill 0.35)
  Top 0.254: IC22.1 80.08,17.22 80.08,31.82 v48.33,63.57
  Bottom 0.254: v48.33,63.57 44.52,67.38 U1.33
TSSP23  (via drill 0.35)
  Top 0.254: IC23.1 120.03,23.62 111.83,31.82 102.94,31.82 102.43,32.33 102.43,37.41 96.59,43.25 94.05,43.25 v85.16,52.14 | v78.81,58.49 69.92,67.38 v69.92,68.65
  Bottom 0.254: v85.16,52.14 82.62,52.14 78.81,55.95 v78.81,58.49 | v69.92,68.65 66.11,68.65 64.84,69.92 63.57,69.92 62.3,71.19 U1.40
TSSP24  (via drill 0.35)
  Top 0.254: IC24.1 118.46,54.4 105.48,67.38 v102.94,67.38 | v86.43,67.38 83.89,69.92 83.89,73.73 v82.62,75 | v72.46,76.27 71.19,76.27 v67.38,80.08
  Bottom 0.254: v102.94,67.38 v86.43,67.38 | v82.62,75 76.27,81.35 75,81.35 72.46,78.81 v72.46,76.27 | v67.38,80.08 64.84,77.54 U1.41
TX
  Top 0.254: U1.29 53.41,86.43 53.41,71.19 57.22,67.38 JP6.2

## Text on the board
tPlace: IR PCB SOCCER / Andy's Geese 2024 / Lightweight League Soccer / V 3.0 | +5V | GND | RX | TX | MISO | MOSI | CS | SCLK | GND | TX | RX | +5V | GND | +3.3V | GND | CS | MOSI | MISO | SCLK | +3.3V